# Altium PCB bms_slave.PcbDoc (part 1 of 2)
Units mm, origin at the board's own origin, x right, y up, seen from the top; angles counter-clockwise.
Board outline 145.01 x 85.89 mm, 4 copper layers (Top, Internal Plane 1, Internal Plane 2, Bottom), stack 2.023 mm thick; 168 components, 117 nets, 483 pads, 146 vias.
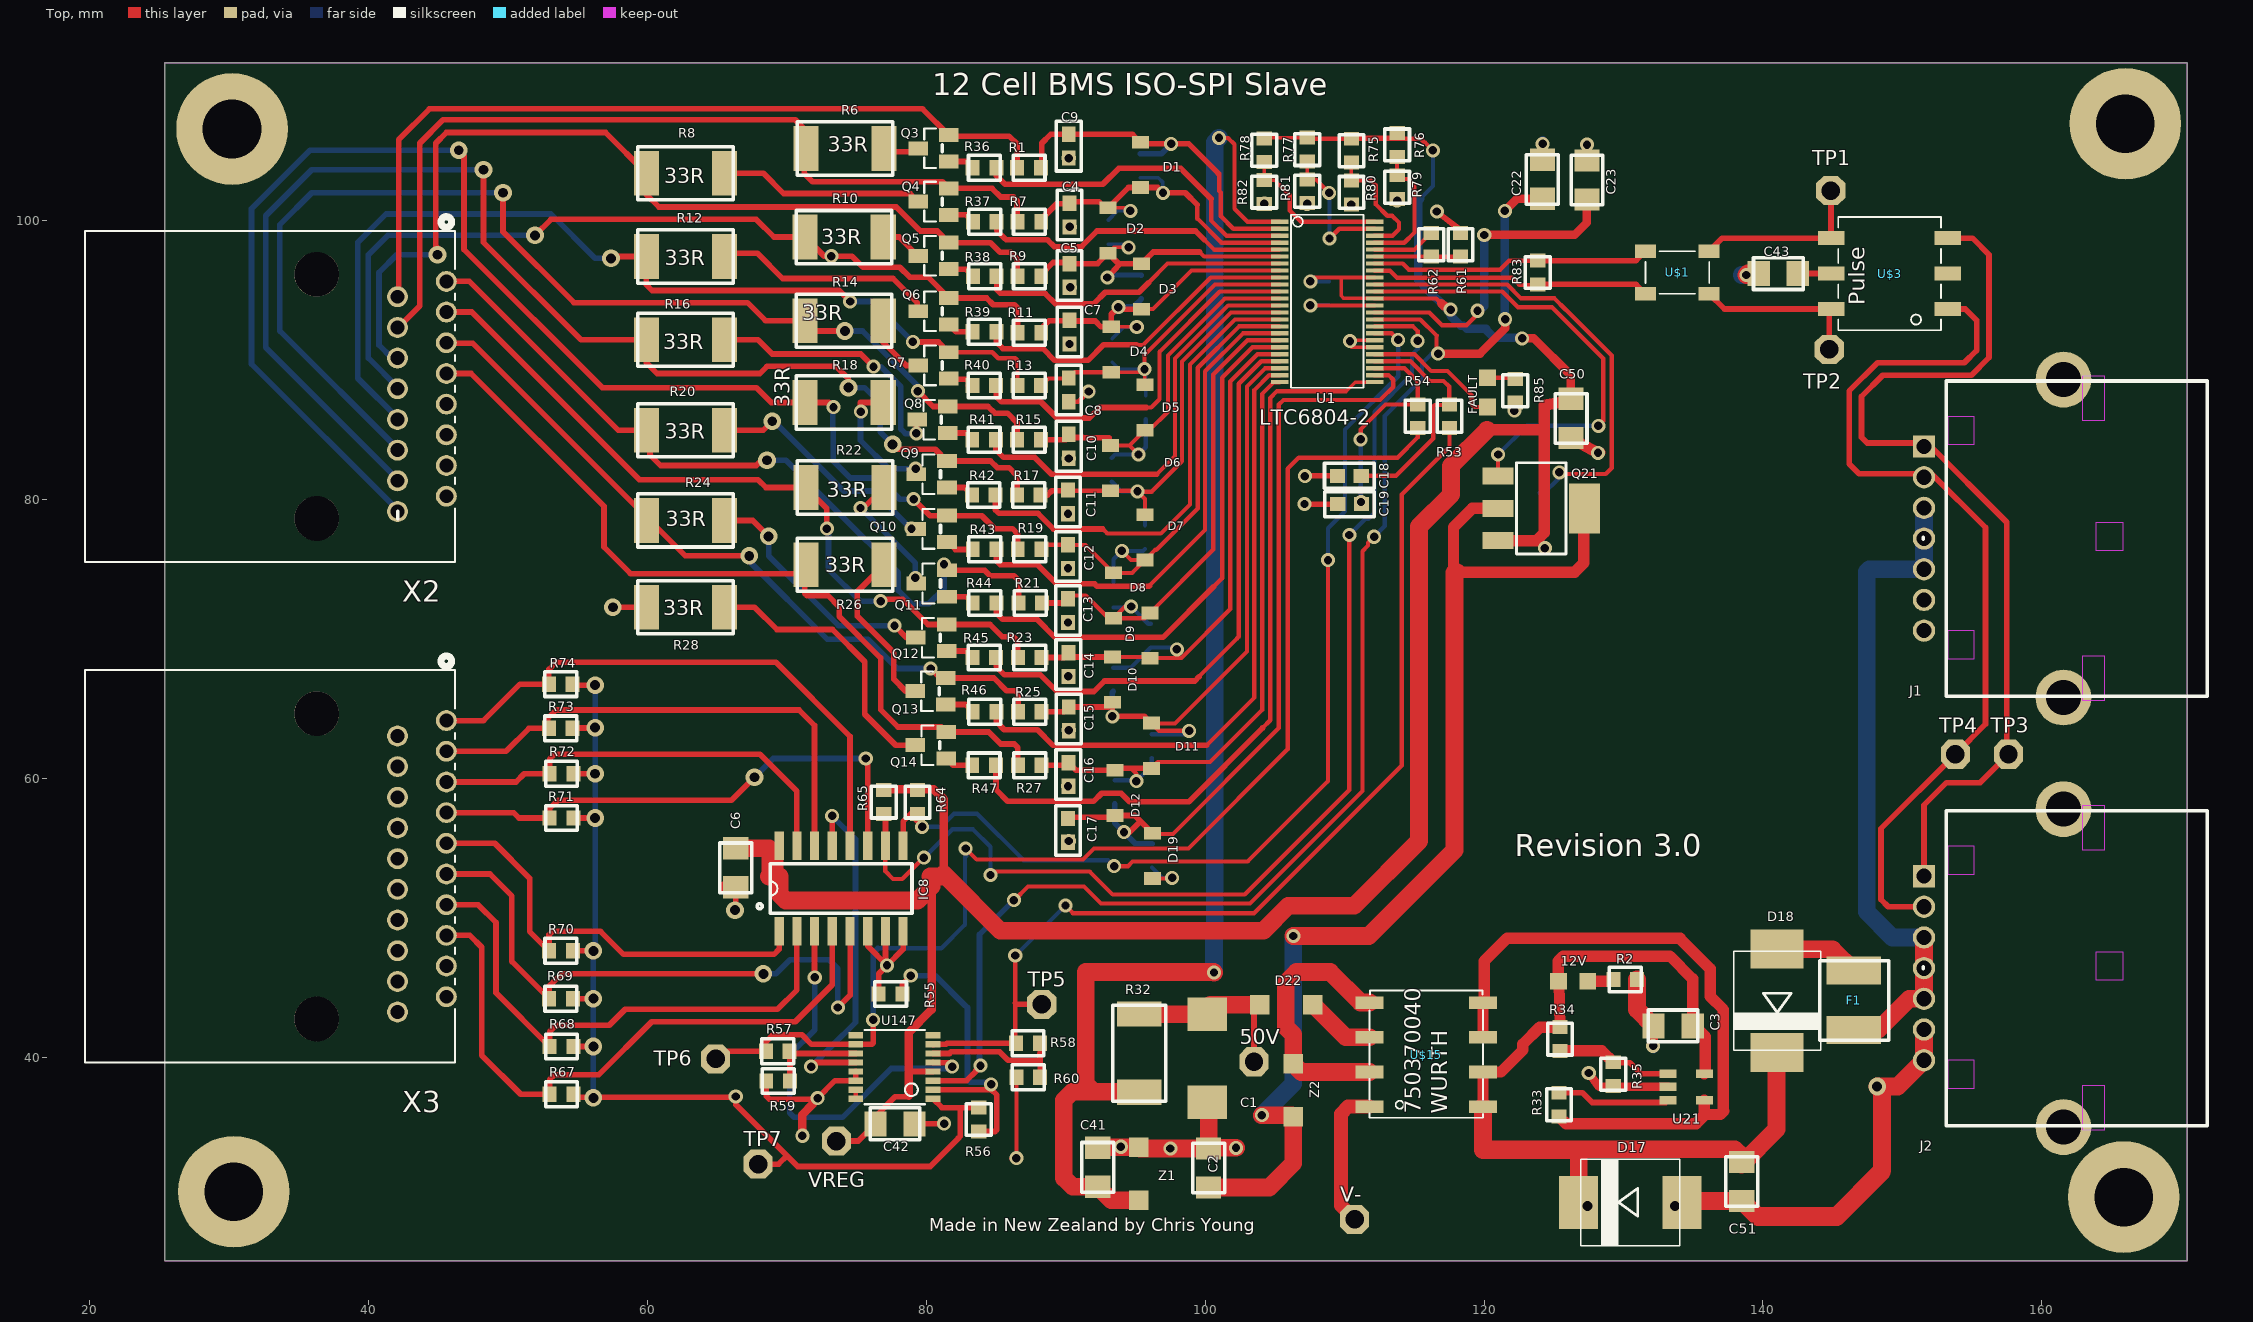
[diagram p0: Top view]
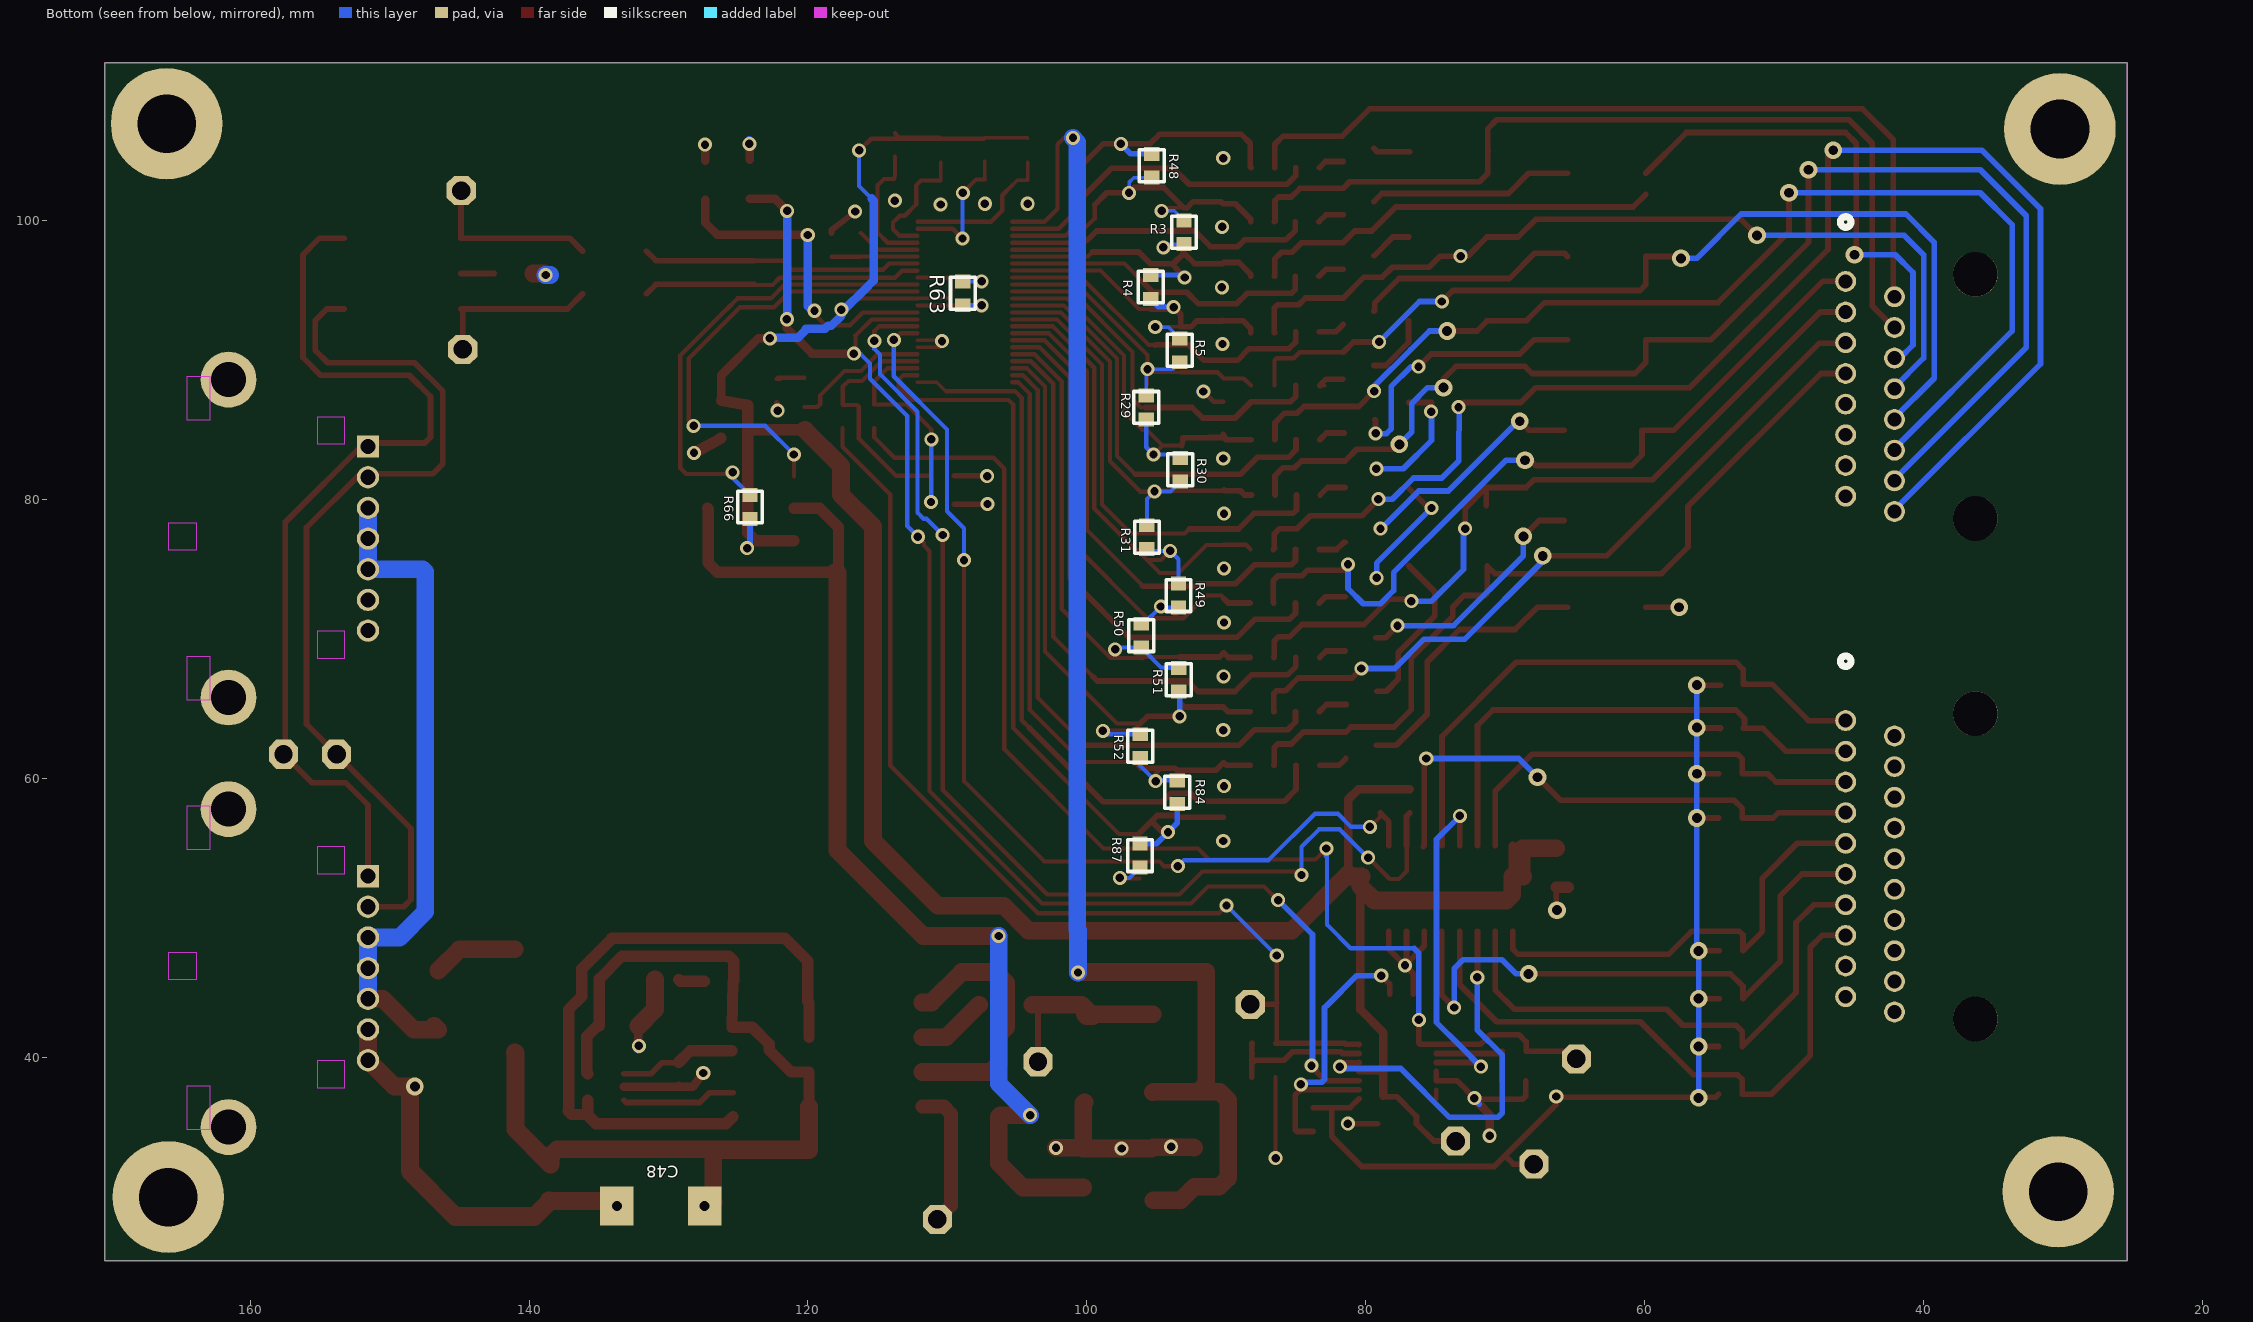
[diagram p1: Bottom view, seen from below]
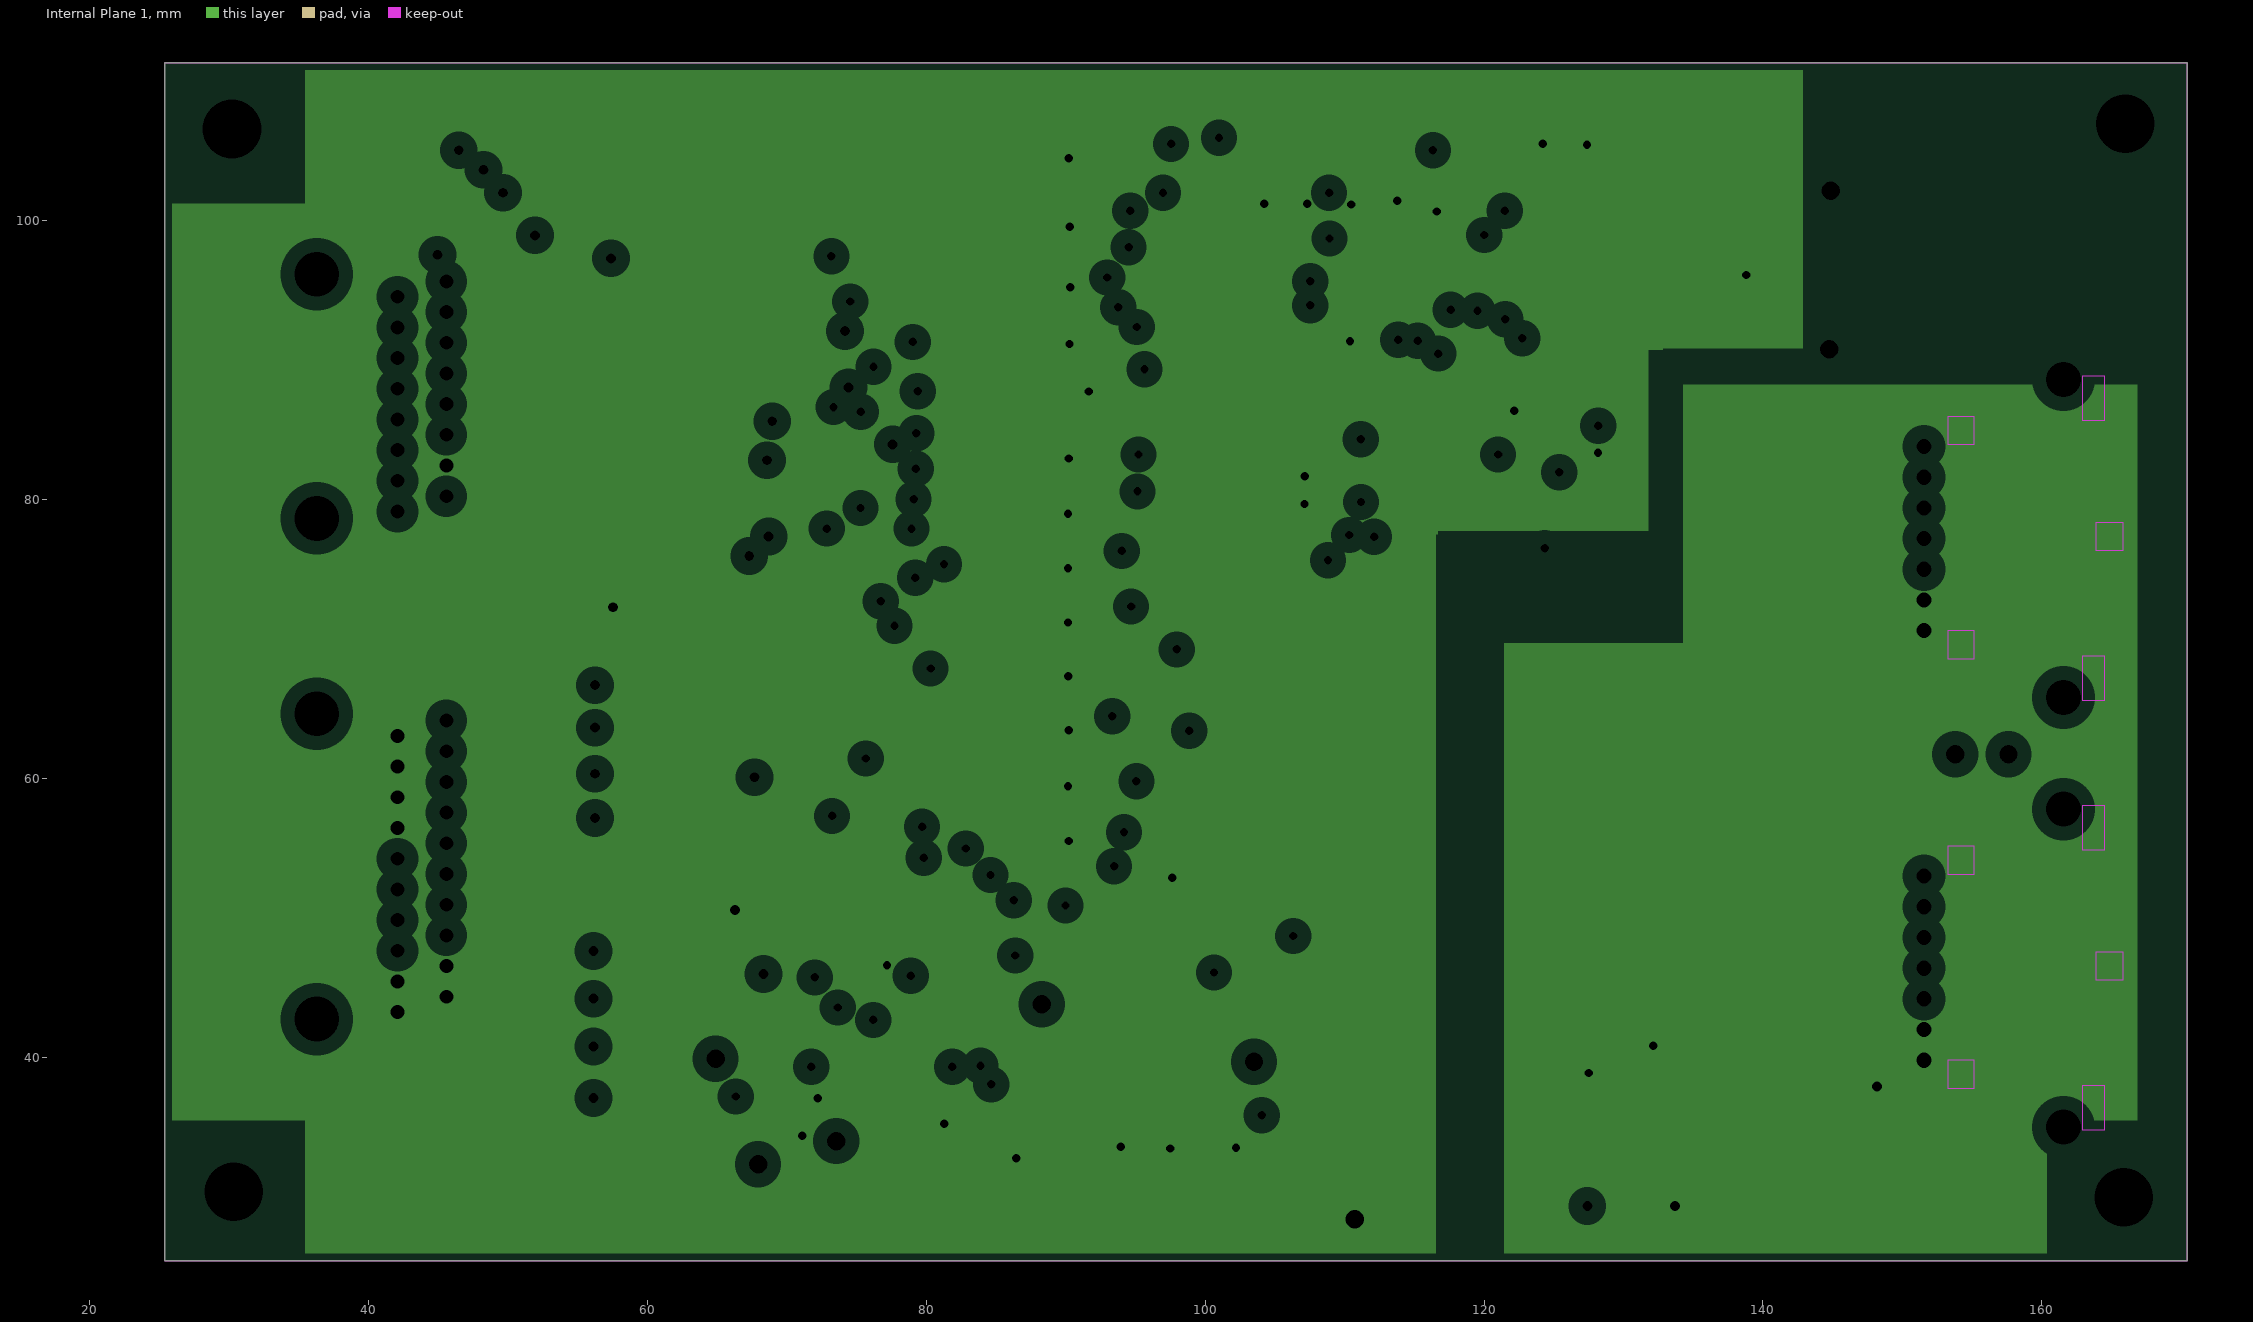
[diagram p2: Internal Plane 1, clearances drawn from the general rule]
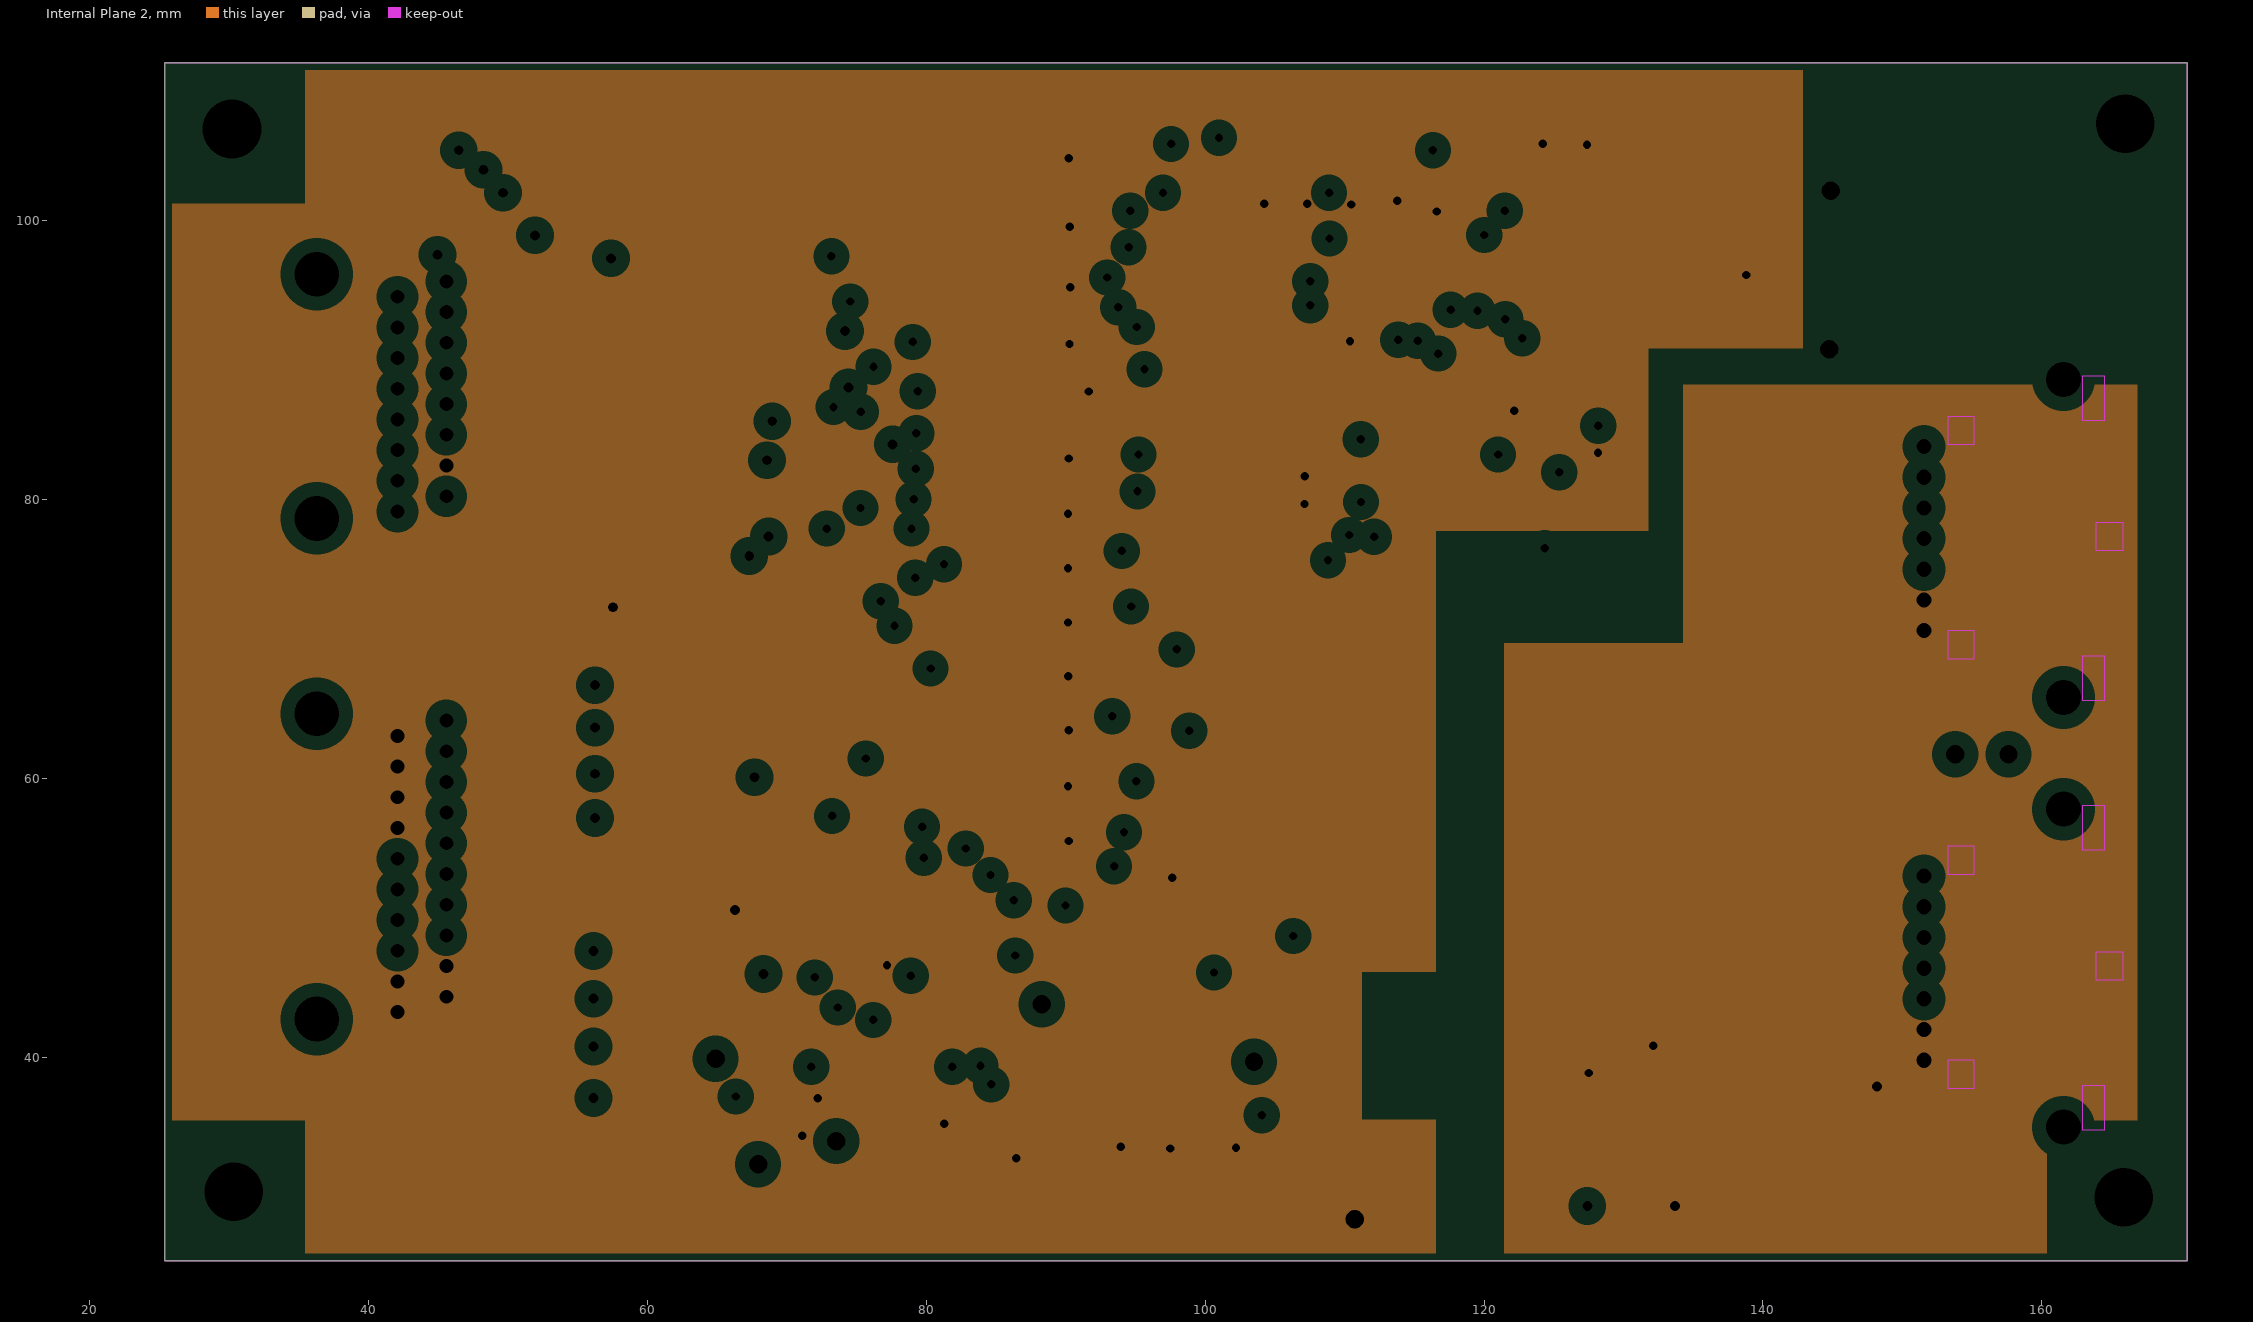
[diagram p3: Internal Plane 2, clearances drawn from the general rule]

## Layer stack, top to bottom
Top Solder: solder mask 0.0102, Solder Resist, Dk 3.5
Top: signal copper 0.035
Dielectric 1: core 1.5, FR-4, Dk 4.8
Internal Plane 1: plane copper 0.036, net V-
Dielectric 3: prepreg 0.127, Dk 4.2
Internal Plane 2: plane copper 0.036, net V-
Dielectric 2: core 0.254, Dk 4.2
Bottom: signal copper 0.035
Bottom Solder: solder mask 0.0102, Solder Resist, Dk 3.5

## Board outline
25.4,25.4 170.409,25.4 170.409,111.293 25.4,111.293

## Design rules (kind name [scope] priority, off if disabled: settings)
Clearance [All] p1: gap=0.152 ignorepadtopadclearanceinfootprint=FALSE
Clearance "Clearance (Same Net)" [All] p2: gap=0 ignorepadtopadclearanceinfootprint=FALSE
ComponentClearance [All] p1 off: gap=0.254 collisioncheckmode=3 verticalgap=0.254 showdistances=FALSE
HoleSize HoleSize_1 [All] p1: absolutevalues=TRUE maxlimit=2540 minlimit=0.305 maxpercent=80.000 minpercent=20.000
HoleSize [All] p2: absolutevalues=TRUE maxlimit=2.54 minlimit=0.025 maxpercent=80.000 minpercent=20.000
HoleToHoleClearance mdViaViaSameLayer [All] p1: gap=0.203 allowstackedmicrovias=TRUE
HoleToHoleClearance [All] p2: gap=0.254 allowstackedmicrovias=TRUE
MinimumSolderMaskSliver [All] p1 off: minsoldermaskwidth=0.254
PasteMaskExpansion mlMinCreamFrame [All] p1: expansion=0
PasteMaskExpansion [All] p2: expansion=0
PlaneClearance [All] p1: clearance=1
PlaneConnect [All] p1: planeconnectstyle=Relief reliefexpansion=0.508 reliefentries=4 reliefconductorwidth=0.254 reliefairgap=0.254
PolygonConnect ThermalVias [IsVia] p1: connectstyle=Direct reliefconductorwidth=0.254 reliefentries=4 polygonreliefangle="90 Angle" airgapwidth=0.254
PolygonConnect [All] p2: connectstyle=Relief reliefconductorwidth=0.254 reliefentries=4 polygonreliefangle="90 Angle" airgapwidth=0.254
RoomDefinition bms_slave [InComponentClass('bms_slave')] p1: confinementstyle=ConfineIn formatcopy=TRUE lockcomponents=FALSE outline 1.651,24.638 173.482,24.638 173.482,111.293 1.651,111.293
RoutingVias [All] p1: holewidth=0.711 width=1.27 viastyle="Through Hole" minholewidth=0.711 minwidth=1.27 maxholewidth=0.711 maxwidth=1.27
SilkToSilkClearance [All] p1 off: silktosilkclearance=0.254
SilkToSolderMaskClearance [IsPad] p1 off: minsilkscreentomaskgap=0.254 clearancetoexposedcopper=TRUE
SolderMaskExpansion mlMinStopFrame [All] p1: expansion=0.102
SolderMaskExpansion [All] p2: expansion=0.102
Width Width_1 [All] p1: maxlimit=2540 minlimit=0.152 preferedwidth=0.406 minimp=50.000000 maximp=50.000000 favimp=50.000000
Width [All] p2: maxlimit=5 minlimit=0.152 preferedwidth=0.406 minimp=50.000000 maximp=50.000000 favimp=50.000000
21 further rules are at their usual default settings.

## Components (designator, comment, footprint, x,y, rotation, side; value= is the part's Value field where it differs from the comment)
12V "Green" CHIP-LED0805 126.39,45.441 r270 top
50V "PTR1PAD1-13" P1-13 103.505,39.675 r0 top
C1 "1uF 100V" SMC_D 100.152,39.929 r270 top
C2 "4.7uF" C1206 100.254,32.055 r90 top
C3 "4.7uF" C1206 133.553,42.24 r180 top
C4 "100nF" C0603@1 90.272,100.381 r270 top
C5 "100nF" C0603@1 90.272,96.05 r270 top
C6 "0.1uF" C1206 66.345,53.581 r270 top
C7 "100nF" C0603@1 90.272,91.986 r270 top
C8 "100nF" C0603@1 90.221,87.846 r270 top
C9 "100nF" C0603@1 90.221,105.321 r270 top
C10 "100nF" C0603@1 90.221,83.807 r270 top
C11 "100nF" C0603@1 90.17,79.819 r270 top
C12 "100nF" C0603@1 90.17,75.895 r270 top
C13 "100nF" C0603@1 90.17,72.022 r270 top
C14 "100nF" C0603@1 90.195,68.148 r270 top
C15 "100nF" C0603@1 90.221,64.262 r270 top
C16 "100nF" C0603@1 90.195,60.274 r270 top
C17 "100nF" C0603@1 90.17,56.261 r270 top
C18 "10nF" C0603@1 110.338,81.686 r180 top
C19 "10nF" C0603@1 110.363,79.654 r180 top
C22 "1uF" C1206 124.181,102.946 r90 top
C23 "1uF" C1206 127.381,102.895 r90 top
C41 "0.1uF" C1206 92.304,32.106 r90 top
C42 "0.1uF" C1206 77.762,35.217 r0 top
C43 "100pF" C1206@1 141.097,96.19 r180 top
C48 "10uF" SMC_D 130.556,29.337 r0 bottom
C50 "1uF" C1206 126.238,85.801 r270 top
C51 "4.7uF" C1206 138.481,31.09 r270 top
D1 "SMF5.0AT1" SOD123FL 95.352,103.988 r270 top
D2 "SMF5.0AT1" SOD123FL 93.04,99.276 r270 top
D3 "SMF5.0AT1" SOD123FL 95.428,95.263 r270 top
D4 "SMF5.0AT1" SOD123FL 93.269,90.742 r270 top
D5 "SMF5.0AT1" SOD123FL 95.682,86.589 r270 top
D6 "SMF5.0AT1" SOD123FL 93.205,82.233 r270 top
D7 "SMF5.0AT1" SOD123FL 95.694,77.279 r270 top
D8 "SMF5.0AT1" SOD123FL 93.434,73.101 r270 top
D9 "SMF5.0AT1" SOD123FL 96.037,70.231 r270 top
D10 "SMF5.0AT1" SOD123FL 93.345,67.069 r270 top
D11 "SMF5.0AT1" SOD123FL 96.139,62.332 r270 top
D12 "SMF5.0AT1" SOD123FL 93.548,58.953 r270 top
D17 "SCHOTTKY-DIODESMC" SMC 130.48,29.591 r0 top
D18 "S3D" SMC 141.021,44.044 r90 top
D19 "SMF5.0AT1" SOD123FL 96.228,54.432 r270 top
D22 "CMHD459A" SOD123 105.816,43.764 r0 top
F1 "LITTLEFUSE_PTC" 1812 146.482,41.961 r90 top
FAULT "RED" CHIP-LED0805 120.244,87.668 r0 top
IC8 "4052D" SO16 73.901,52.095 r0 top
J1 "MX34007NF1" CONN_MX34007NF1 151.544,77.186 r90 top
J2 "MX34007NF1" CONN_MX34007NF1 151.544,46.385 r90 top
Q3 "SI2351" SOT23 80.518,105.169 r90 top
Q4 "SI2351" SOT23 80.518,101.346 r90 top
Q5 "SI2351" SOT23 80.518,97.46 r90 top
Q6 "SI2351" SOT23 80.518,93.485 r90 top
Q7 "SI2351" SOT23 80.518,89.599 r90 top
Q8 "SI2351" SOT23 80.454,85.712 r90 top
Q9 "SI2351" SOT23 80.391,81.801 r90 top
Q10 "SI2351" SOT23 80.391,77.876 r90 top
Q11 "SI2351" SOT23 80.391,73.965 r90 top
Q12 "SI2351" SOT23 80.366,70.079 r90 top
Q13 "SI2351" SOT23 80.302,66.243 r90 top
Q14 "SI2351" SOT23 80.328,62.37 r90 top
Q21 "NSV1C201MZ4" SOT223 124.104,79.35 r270 top
R1 "100R" R0603 87.376,103.784 r0 top
R2 "3K3" R0603 130.124,45.568 r180 top
R3 "DNF" R0603 93.04,99.149 r270 bottom
R4 "DNF" R0603 95.428,95.225 r270 bottom
R5 "DNF" R0603 93.332,90.678 r270 bottom
R6 "33R" R2512 74.168,105.156 r0 top
R7 "100R" R0603 87.401,99.911 r0 top
R8 "33R" R2512 62.732,103.378 r0 top
R9 "100R" R0603 87.401,95.999 r0 top
R10 "33R" R2512 74.117,98.806 r0 top
R11 "100R" R0603 87.401,91.948 r0 top
R12 "33R" R2512 62.738,97.409 r0 top
R13 "100R" R0603 87.389,88.163 r0 top
R14 "33R" R2512 74.117,92.812 r0 top
R15 "100R" R0603 87.376,84.277 r0 top
R16 "33R" R2512 62.738,91.44 r0 top
R17 "100R" R0603 87.351,80.315 r0 top
R18 "33R" R2512 74.117,86.944 r0 top
R19 "100R" R0603 87.414,76.416 r0 top
R20 "33R" R2512 62.738,84.963 r0 top
R21 "100R" R0603 87.452,72.568 r0 top
R22 "33R" R2512 74.168,80.848 r0 top
R23 "100R" R0603 87.427,68.656 r0 top
R24 "33R" R2512 62.738,78.486 r0 top
R25 "100R" R0603 87.427,64.77 r0 top
R26 "33R" R2512 74.168,75.311 r0 top
R27 "100R" R0603 87.427,60.922 r0 top
R28 "33R" R2512 62.738,72.263 r0 top
R29 "DNF" R0603 95.745,86.589 r270 bottom
R30 "DNF" R0603 93.307,82.118 r270 bottom
R31 "DNF" R0603 95.694,77.292 r270 bottom
R32 "100R 2W" R2512 95.275,40.284 r90 top
R33 "130K" R0603 125.374,36.601 r90 top
R34 "100k" R0603 125.451,41.3 r90 top
R35 "22K1" R0603 129.261,38.786 r90 top
R36 "3K3" R0603 84.176,103.784 r0 top
R37 "3K3" R0603 84.201,99.911 r0 top
R38 "3K3" R0603 84.201,95.999 r0 top
R39 "3K3" R0603 84.176,92.011 r0 top
R40 "3K3" R0603 84.163,88.163 r0 top
R41 "3K3" R0603 84.15,84.277 r0 top
R42 "3K3" R0603 84.125,80.315 r0 top
R43 "3K3" R0603 84.188,76.416 r0 top
R44 "3K3" R0603 84.188,72.568 r0 top
R45 "3K3" R0603 84.163,68.656 r0 top
R46 "3K3" R0603 84.188,64.77 r0 top
R47 "3K3" R0603 84.15,60.922 r0 top
R48 "DNF" R0603 95.352,103.924 r270 bottom
R49 "DNF" R0603 93.434,73.101 r270 bottom
R50 "DNF" R0603 96.101,70.231 r270 bottom
R51 "DNF" R0603 93.408,67.069 r270 bottom
R52 "DNF" R0603 96.164,62.306 r270 bottom
R53 "100R" R0603 117.526,85.954 r270 top
R54 "100R" R0603 115.24,85.954 r270 top
R55 "10K" R0603 77.445,44.526 r0 top
R56 "4K99" R0603 83.769,35.535 r270 top
R57 "10K" R0603 69.355,40.424 r0 top
R58 "10K" R0603 87.3,41.008 r0 top
R59 "10K" R0603 69.38,38.291 r0 top
R60 "10K" R0603 87.325,38.557 r0 top
R61 "806R" R0603 118.313,98.247 r90 top
R62 "1K21" R0603 116.205,98.247 r270 top
R63 "LiNK" R0603 108.89,94.767 r90 bottom
R64 "10K" R0603 79.375,58.293 r90 top
R65 "10K" R0603 76.962,58.293 r90 top
R66 "1M" R0603 124.155,79.451 r270 bottom
R67 "78K7" R0603 53.848,37.338 r0 top
R68 "78K7" R0603 53.848,40.767 r0 top
R69 "78K7" R0603 53.809,44.196 r0 top
R70 "78K7" R0603 53.809,47.625 r0 top
R71 "78K7" R0603 53.848,57.15 r0 top
R72 "78K7" R0603 53.848,60.325 r0 top
R73 "78K7" R0603 53.797,63.576 r0 top
R74 "78K7" R0603 53.797,66.751 r0 top
R75 "R-US_R0603" R0603 110.49,105.004 r270 top
R76 "R-US_R0603" R0603 113.767,105.41 r270 top
R77 "R-US_R0603" R0603 107.315,105.08 r270 top
R78 "R-US_R0603" R0603 104.242,105.029 r270 top
R79 "R-US_R0603" R0603 113.767,102.387 r270 top
R80 "R-US_R0603" R0603 110.49,102.006 r270 top
R81 "R-US_R0603" R0603 107.315,102.083 r270 top
R82 "R-US_R0603" R0603 104.242,102.032 r270 top
R83 "120R" R0603 123.85,96.266 r90 top
R84 "DNF" R0603 93.523,59.004 r270 bottom
R85 "3K3" R0603 122.237,87.782 r90 top
R87 "100R" R0603 96.19,54.458 r90 bottom
TP1 "PTR1PAD1-13" P1-13 144.856,102.133 r0 top
TP2 "PTR1PAD1-13" P1-13 144.755,90.754 r0 top
TP3 "PTR1PAD1-13" P1-13 157.607,61.722 r0 top
TP4 "PTR1PAD1-13" P1-13 153.797,61.722 r0 top
TP5 "PTR1PAD1-13" P1-13 88.29,43.79 r0 top
TP6 "PTR1PAD1-13" P1-13 64.897,39.878 r0 top
TP7 "PTR1PAD1-13" P1-13 67.945,32.334 r0 top
U1 "LTC6804-2" SSOP48 105.359,99.924 r270 top
U21 "LT8300" TSOT23-5 134.493,37.871 r270 top
U147 "LT6005IGN" TSSOP16 77.724,39.294 r90 top
U$1 "DLW43SH510XK2" DLW43S 131.572,97.79 r270 top
U$3 "T3001NL" T3001NL 153.264,93.65 r90 top
U$15 "WURTH_750370040" WE_750370040 111.785,36.449 r0 top
V- "PTR1PAD1-13" P1-13 110.719,28.372 r0 top
VREG "PTR1PAD1-13" P1-13 73.558,33.985 r0 top
X2 "MX34016NF1" CONN_MX34016NF1 36.307,96.063 r270 top
X3 "Part Number: MX34020NF1" CONN_MX34020NF1 38.593,43.235 r270 top value=Value
Z1 "CMHZ5265B" SOD123 95.25,31.648 r90 top
Z2 "CMMSH1-40" SOD123 106.324,37.617 r90 top

## Footprints (in the part's own frame and the unit in brackets; to place one, negate y for a bottom-side part, rotate by r counter-clockwise, add the part's x,y. Pads: shape width x height; smd on the part's side, far side on the other; paste and mask are expansions set on the pad)
1812 [mm] "1812"
  rect 2x3.9 smd: P$1(0,-0.03) P$2(4.25,-0.03)
  silkscreen extent -0.76,-2.54 4.95,2.41
C0603@1 [mm] "C0603@1"
  rect 1.1x1 smd: 1(-0.85,0) 2(0.85,0)
  silkscreen extent -1.78,-0.89 1.78,0.89
C1206 [mm] "C1206"
  rect 1.6x1.8 smd: 1(-1.4,0) 2(1.4,0)
  silkscreen extent -1.78,-1.14 1.78,1.14
C1206@1 [mm] "C1206@1"
  rect 1.6x1.8 smd: 1(-1.4,0) 2(1.4,0)
  silkscreen extent -1.78,-1.14 1.78,1.14
CHIP-LED0805 [mm] "CHIP-LED0805"
  rect 1.2x1.2 smd: A(0,-1.05) C(0,1.05)
CONN_MX34007NF1 [mm]
  round 4 hole 2.5: 0(-11.4,-10) 0(11.4,-10)
  rect 1.6x1.6 hole 1.092: 1(6.6,0)
  round 1.6 hole 1.092: 2(4.4,0) 3(2.2,0) 4(0,0) 5(-2.2,0) 6(-4.4,0) 7(-6.6,0)
  Keep-Out Layer region: 8.5,-12.95 11.65,-12.95 11.65,-11.35 8.5,-11.35
  Keep-Out Layer region: 6.75,-3.6 8.75,-3.6 8.75,-1.7 6.75,-1.7
  Keep-Out Layer region: -8.6,-3.6 -6.6,-3.6 -6.6,-1.7 -8.6,-1.7
  Keep-Out Layer region: -0.85,-14.3 1.15,-14.3 1.15,-12.3 -0.85,-12.3
  Keep-Out Layer region: -11.6,-12.95 -8.45,-12.95 -8.45,-11.35 -11.6,-11.35
  silkscreen extent -11.3,-20.3 11.3,0.05
CONN_MX34016NF1 [mil]
  round 59 hole 39 mask+0: 1(17.17,365.59) 2(60.47,227.8) 3(103.78,365.59) 4(147.09,227.8) 5(190.39,365.59) 6(233.7,227.8) 7(277.01,365.59) 8(320.31,227.8) 9(363.62,365.59) 10(406.93,227.8) 11(450.24,365.59) 12(493.54,227.8) 13(536.85,365.59) 14(580.16,227.8) 15(623.46,365.59) 16(666.77,227.8)
  round 126 hole 126: 17(-2.52,-0.55) 18(686.46,-0.55)
  silkscreen extent -165,-655 809,390, body extent 840,90 850,100, height 10
CONN_MX34020NF1 [mil]
  round 59 hole 39 mask+0: 1(-822.83,275.59) 2(-779.53,137.8) 3(-736.22,275.59) 4(-692.91,137.8) 5(-649.61,275.59) 6(-606.3,137.8) 7(-562.99,275.59) 8(-519.69,137.8) 9(-476.38,275.59) 10(-433.07,137.8) 11(-389.76,275.59) 12(-346.46,137.8) 13(-303.15,275.59) 14(-259.84,137.8) 15(-216.54,275.59) 16(-173.23,137.8) 17(-129.92,275.59) 18(-86.61,137.8) 19(-43.31,275.59) 20(0,137.8)
  round 126 hole 126: 21(-842.52,-90.55) 22(19.68,-90.55)
  silkscreen extent -1005,-745 143,300, body extent 0,0 10,10, height 10
DLW43S [mm] "DLW43S"
  rect 1x1.5 smd: P$1(0,0) P$2(0,4.572) P$3(3.048,4.572) P$4(3.048,0)
  silkscreen extent 0,0 3.05,4.57
P1-13 [mil] "P1-13"
  oct 82.3x82.3 hole 52: TP(0,0)
R0603 [mm] "R0603"
  rect 1x1.1 smd: 1(-0.85,0) 2(0.85,0)
  silkscreen extent -1.14,-0.89 1.14,0.89
R2512 [mm] "R2512"
  rect 1.8x3.2 smd: 1(-2.8,0) 2(2.8,0)
  silkscreen extent -3.43,-1.91 3.43,1.91
SMC [mm] "SMC"
  rect 2.8x3.8 smd: A(3.7,0) C(-3.7,0)
  silkscreen extent -3.56,-3.1 3.56,3.1
SMC_D [mm] "SMC_D"
  rect 2.4x2.8 smd: +(-3.15,0) -(3.15,0)
SO16 [mil] "SO16"
  rect 26x80 smd: 1(-175,-121) 2(-125,-121) 3(-75,-121) 4(-25,-121) 5(25,-121) 6(75,-121) 7(125,-121) 8(175,-121) 9(175,121) 10(125,121) 11(75,121) 12(25,121) 13(-25,121) 14(-75,121) 15(-125,121) 16(-175,121)
  silkscreen extent -237,-70 200,70
SOD123 [mm] "SOD123"
  rect 1.4x1.4 smd: A(1.9,0) C(-1.9,0)
SOD123FL [mm] "SOD123FL"
  rect 0.91x1.22 smd: A(1.625,0) C(-1.625,0)
SOT23 [mm] "SOT23"
  rect 1x1.4 smd: 1(-0.95,-1.1) 2(0.95,-1.1) 3(0,1.1)
  silkscreen extent -1.42,-0.64 1.42,0.66
SOT223 [mil] "SOT223"
  rect 48x88 smd: 1(-91,-122) 2(0,-122) 3(91,-122)
  rect 141.73x86.61 smd: 4(0,122.01)
  silkscreen extent -129,-70 129,70
SSOP48 [mm] "SSOP48"
  rect 0.3x1.25 smd: 1(0.02,-0.01) 2(0.52,-0.01) 3(1.02,-0.01) 4(1.52,-0.01) 5(2.02,-0.01) 6(2.52,-0.01) 7(3.02,-0.01) 8(3.52,-0.01) 9(4.02,-0.01) 10(4.52,-0.01) 11(5.02,-0.01) 12(5.52,-0.01) 13(6.02,-0.01) 14(6.52,-0.01) 15(7.02,-0.01) 16(7.52,-0.01) 17(8.02,-0.01) 18(8.52,-0.01) 19(9.02,-0.01) 20(9.52,-0.01) 21(10.02,-0.01) 22(10.52,-0.01) 23(11.02,-0.01) 24(11.52,-0.01) 25(11.52,6.79) 26(11.02,6.79) 27(10.52,6.79) 28(10.02,6.79) 29(9.52,6.79) 30(9.02,6.79) 31(8.52,6.79) 32(8.02,6.79) 33(7.52,6.79) 34(7.02,6.79) 35(6.52,6.79) 36(6.02,6.79) 37(5.52,6.79) 38(5.02,6.79) 39(4.52,6.79) 40(4.02,6.79) 41(3.52,6.79) 42(3.02,6.79) 43(2.52,6.79) 44(2.02,6.79) 45(1.52,6.79) 46(1.02,6.79) 47(0.52,6.79) 48(0.02,6.79)
  silkscreen extent -0.48,0.79 11.92,5.99
T3001NL [mil] "T3001NL"
  rect 40x75 smd: P$1(0,0) P$2(100,0) P$3(200,0) P$4(200,330) P$5(100,330) P$6(0,330)
  silkscreen extent -60,20 260,310
TSOT23-5 [mm] "TSOT23-5"
  rect 0.62x1.22 smd: 1(-0.95,-1.3) 2(0,-1.3) 3(0.95,-1.3) 4(0.95,1.3) 5(-0.95,1.3)
TSSOP16 [mm] "TSSOP16"
  rect 0.45x1.05 smd mask-0.525: 1(-2.275,-2.768) 2(-1.625,-2.768) 3(-0.975,-2.768) 4(-0.325,-2.768) 5(0.325,-2.768) 6(0.975,-2.768) 7(1.625,-2.768) 8(2.275,-2.768) 9(2.275,2.768) 10(1.625,2.768) 11(0.975,2.768) 12(0.325,2.768) 13(-0.325,2.768) 14(-0.975,2.768) 15(-1.625,2.768) 16(-2.275,2.768)
  silkscreen extent -2.67,-2.18 2.67,2.16
WE_750370040 [mm] "WE_750370040"
  rect 2x0.9 smd: P$1(0,0) P$2(0,2.49) P$3(0,4.98) P$4(0,7.47) P$5(8.14,7.47) P$6(8.14,4.98) P$7(8.14,2.49) P$8(8.14,0)
  silkscreen extent 0,-0.79 8.13,8.33

## Part data
12V FAULT: library part LEDCHIP-LED0805, "LED   OSRAM: - CHIPLED LG R971, LG N971, LY N971, LG Q971, LY Q971, LO R971, LY R971 LH N974, LH R974 LS Q976, LO Q976, LY Q976 LO Q996 - Hyper CHIPLED LW Q18S LB Q993, LB Q99A, LB R99A - SideLED LS A670, LO A670, LY A670, LG A670, LP A670 LB A673, LV A673, LT A673, LW A673 LH A674 LY A675 LS A676, LA A676, LO A676, LY A676, LW A676 LS A679, LY A679, LG A679 -  Hyper Micro SIDELED® LS Y876, LA Y876, LO Y876, LY Y876 LT Y87S - SmartLED LW L88C, LW L88S LB L89C, LB L89S, LG L890 LS L89K, LO L89K, LY L89K LS L896, LA L896, LO L896, LY L896 - TOPLED LS T670, LO T670, LY T670, LG T670, LP T670 LSG T670, LSP T670, LSY T670, LOP T670, LYG T670 LG T671, LOG T671, LSG T671 LB T673, LV T673, LT T673, LW T673 LH T674 LS T676, LA T676, LO T676, LY T676, LB T676, LH T676, LSB T676, LW T676 LB T67C, LV T67C, LT T67C, LS T67K, LO T67K, LY T67K, LW E67C LS E67B, LA E67B, LO E67B, LY E67B, LB E67C, LV E67C, LT E67C LW T67C LS T679, LY T679, LG T679 LS T770, LO T770, LY T770, LG T770, LP T770 LB T773, LV T773, LT T773, LW T773 LH T774 LS E675, LA E675, LY E675, LS T675 LS T776, LA T776, LO T776, LY T776, LB T776 LHGB T686 LT T68C, LB T68C - Hyper Mini TOPLED® LB M676 - Mini TOPLED Santana® LG M470 LS M47K, LO M47K, LY M47K    Source: http://www.osram.convergy.de   LUXEON: - LUMILED® LXK2-PW12-R00, LXK2-PW12-S00, LXK2-PW14-U00, LXK2-PW14-V00 LXK2-PM12-R00, LXK2-PM12-S00, LXK2-PM14-U00 LXK2-PE12-Q00, LXK2-PE12-R00, LXK2-PE12-S00, LXK2-PE14-T00, LXK2-PE14-U00 LXK2-PB12-K00, LXK2-PB12-L00, LXK2-PB12-M00, LXK2-PB14-N00, LXK2-PB14-P00, LXK2-PB14-Q00 LXK2-PR12-L00, LXK2-PR12-M00, LXK2-PR14-Q00, LXK2-PR14-R00 LXK2-PD12-Q00, LXK2-PD12-R00, LXK2-PD12-S00 LXK2-PH12-R00, LXK2-PH12-S00 LXK2-PL12-P00, LXK2-PL12-Q00, LXK2-PL12-R00    Source: www.luxeon.com   KINGBRIGHT:   KA-3528ASYC Source: www.kingbright.com"
50V TP1 TP2 TP3 TP4 TP5 TP6 TP7 V- VREG: "TEST PIN", TP_SIGNAL_NAME=>TP_SIGNAL_NAME
C1: library part CPOL-USSMCD, "POLARIZED CAPACITOR, American symbol"
C2 C3 C6 C22 C23 C41 C42 C50 C51: library part C-EUC1206, "CAPACITOR, European symbol"
C4 C5 C7 C8 C9 C10 C11 C12 C13 C14 C15 C16 C17 C18 C19: library part C-EU-SMALL_0603
C43: library part C-EU-SMALL
C48: library part CPOL-EUSMCD, "POLARIZED CAPACITOR, European symbol", +=+
D1 D2 D3 D4 D5 D6 D7 D8 D9 D10 D11 D12 D19: "200 W Transient Voltage Suppressor   Source: Data sheet"
D17: "Schottky Diode"
D18: library part DIODE-SMC, "DIODE"
IC8: "Dual 4-channel ANALOG MULTIPLEXER", GND=GND, VCC=VCC, VEE=VEE
R1 R2 R3 R4 R5 R7 R9 R11 R13 R15 R17 R19 R21 R23 R25 R27 R29 R30 R31 R33 R34 R35 R36 R37 R38 R39 R40 R41 R42 R43 R44 R45 R46 R47 R48 R49 R50 R51 R52 R53 R54 R55 R56 R57 R58 R59 R60 R61 R62 R63 R64 R65 R66 R67 R68 R69 R70 R71 R72 R73 R74 R83 R84 R85 R87: library part R-US_R0603, "RESISTOR, American symbol"
R6 R8 R10 R12 R14 R16 R18 R20 R22 R24 R26 R28 R32: library part R-US_R2512, "RESISTOR, American symbol"
R75 R76 R77 R78 R79 R80 R81 R82: "RESISTOR, American symbol"
X3: library part MX34020NF1, "No Description Available", Built_By=EMA_Cory, Copyright="Copyright (C) 2018 Accelerated Designs. All rights reserved", Manufacturer_Part_Number=MX34020NF1, RefDes=RefDes, Type=DEV, Vendor="JAE Electronics"
U1: LTC6803-4=LTC6803-4
U147: V+=V+, V-=V-
U$15: 1=1, 3=3

## Free pads (board coordinates)
  round 8 hole 4.2: 2(30.226,106.553) 2(30.353,30.353) 2(165.862,29.972) 2(165.989,106.934)

## Via types
v1: diameter 1.006/1.006 (per signal layer), hole 0.6, Top to Bottom, 118 vias
v2: diameter 1.27, hole 0.711, Top to Bottom, 27 vias
v3: diameter 1.27/1.27 (per signal layer), hole 0.711, Top to Bottom, 1 vias

## Nets (pads, with @x,y where several pads share a name; then routed paths per layer and width w, separated by ;. In a path a pad name is that pad's centre, name@x,y a point inside that pad or via, vN(x,y) a via of type N, cw(c..) or ccw(c..) an arc to the next point about the centre after c; other vN are vias at no path point)
+12V: 12V.A C3.1 C48.+ C51.1 D17.C D18.C R34.2 U21.5 U$15.P$7 U$15.P$8 | length 74.3
  Top w0.813: U$15.P$8@119.925,36.449 U$15.P$7@119.925,38.939 121.21,38.939 122.784,40.513 122.784,40.945 123.989,42.15 R34.2@125.451,42.15 125.374,45.407 12V.A@125.34,45.441 125.324,45.457 125.324,46.888 125.679,47.244 133.325,47.244 134.953,45.615 C3.1@134.953,42.24 135.103,42.24 135.865,41.478 135.865,38.893 U21.5@135.793,38.821
  Top w1.27: U$15.P$8@119.925,36.449 119.925,33.35 120.091,33.35 ; D17.C@126.78,29.591 126.797,29.591 126.797,33.35 120.091,33.35 ; C51.1@138.481,32.49 138.481,32.588 C51.1@138.455,32.614 ; D18.C@141.021,40.344 140.97,40.293 140.97,34.823 138.455,32.309 C51.1@138.455,32.614 ; 120.091,33.35 120.142,33.401 137.973,33.401 138.455,32.918 C51.1@138.455,32.614
  other v2: 127.406,29.337
A0: R76.2 R79.1 U1.45 | length 9.5
  Top w0.305: U1.45@112.149,98.404 114.279,98.404 115.011,99.136 115.011,102.514 114.554,102.972 113.831,102.972 R79.1@113.767,103.237 R76.2@113.767,104.56
A2: R77.2 R81.1 U1.47 | length 10.1
  Top w0.254: R81.1@107.315,102.932 R77.2@107.315,104.23
  Top w0.305: R81.1@107.315,102.932 107.938,102.932 v1(108.89,101.981) ; v1(108.915,98.704) 109.614,99.404 U1.47@112.149,99.404
  Bottom w0.305: v1(108.89,101.981) 108.915,101.956 v1(108.915,98.704)
BMS_VREF2: C22.1 U1.34 U147.3 | length 103.3
  Top w0.305: v1(86.284,51.257) 86.309,51.257 87.3,52.248 91.313,52.248 92.532,51.029 103.226,51.029 111.277,59.08 111.277,76.276 111.684,76.683 111.684,76.886 v1(112.116,77.318) ; U1.34@112.149,92.904 115.427,92.904 116.586,91.745 ; 116.611,91.745 116.586,91.745 ; v1(116.713,90.449) 116.586,90.576 116.586,91.745
  Top w0.406: U147.3@80.492,38.319 82.896,38.319 83.566,38.989 83.566,39.065 v1(83.896,39.395)
  Top w0.61: v1(116.713,90.449) 119.71,90.449 121.514,92.253 v1(121.514,92.913) ; v1(121.488,100.686) 122.349,101.546 C22.1@124.181,101.546
  Bottom w0.305: v1@86.182,51.156 v1(86.284,51.257) ; v1(112.116,77.318) 112.878,78.08 112.878,85.979 115.545,88.646 115.545,89.738 116.256,90.449 v1(116.713,90.449)
  Bottom w0.406: v1(83.896,39.395) 83.82,39.472 83.82,48.793 v1@86.182,51.156
  Bottom w0.61: v1(121.488,100.686) 121.488,92.939 v1(121.514,92.913)
GND: C3.2 C48.- C51.2 D17.A J1.6 J1.7 J2.6 J2.7 R2.1 R35.1 U21.2 | length 61.6
  Top w0.61: v1(127.508,38.862) 128.245,37.871 U21.2@133.193,37.871 129.325,37.871 R35.1@129.261,37.936 ; v1(132.131,40.818) 132.153,40.84 C3.2@132.153,42.24
  Top w1.27: R2.1@130.974,45.568 130.974,43.419 C3.2@132.153,42.24 ; D17.A@134.18,29.591 134.278,29.69 C51.2@138.481,29.69 ; 148.514,37.096 148.514,31.75 145.287,28.524 139.647,28.524 C51.2@138.481,29.69 ; J2.6@151.544,41.985 J2.7@151.544,39.785 149.656,37.897 v3(148.184,37.897) 148.539,37.541 148.539,31.877 145.288,28.626 139.573,28.626 138.582,29.616 138.582,29.718 138.554,29.69 C51.2@138.481,29.69
  Bottom w0.61: v1(132.131,40.818) v1@132.156,40.564
  other v2: 133.706,29.337
Net12V_C: 12V.C R2.2 | length 1.9
  Top w0.813: 12V.C@127.44,45.441 129.147,45.441 R2.2@129.274,45.568
Net50V_TP: 50V.TP C1.+ D22.C R32.2 | length 14.5
  Top w0.406: 50V.TP@103.505,39.675 103.505,43.353 D22.C@103.916,43.764
  Top w1.27: R32.2@95.275,43.084 95.281,43.079 C1.+@100.152,43.079 100.025,42.951 99.568,42.951 100.381,43.764 D22.C@103.916,43.764
NetC2_1: C2.1 Q21.2 Q21.4 Z2.C | length 80.8
  Top w0.813: Q21.2@121.006,79.35 119.151,79.35 117.805,78.003 117.805,75.057 118.085,74.778 126.492,74.778 127.152,75.438 127.152,79.299 Q21.4@127.203,79.35
  Top w1.27: C2.1@100.254,30.655 104.594,30.655 106.324,32.385 Z2.C@106.324,35.717 106.202,35.839 v1(104.064,35.839) ; v1(106.324,48.692) 111.735,48.692 117.881,54.839 117.881,74.727 117.932,74.778 118.085,74.778
  Bottom w1.27: v1(104.064,35.839) 106.324,38.1 v1(106.324,48.692)
NetC4_1: C4.1 D1.A D2.C R3.1 R7.2 R48.2 U1.4 | length 26.9
  Top w0.254: D2.C@93.04,100.901 94.425,100.901 v1(94.64,100.686)
  Top w0.305: 99.441,101.117 99.441,100.127 101.164,98.404 U1.4@105.349,98.404
  Top w0.406: R7.2@88.251,99.911 88.251,100.088 89.357,101.194 90.235,101.194 C4.1@90.272,101.231 90.387,101.346 92.38,101.346 92.825,100.901 D2.C@93.04,100.901 94.502,102.363 D1.A@95.352,102.363 96.596,102.363 v1(96.977,101.981) 98.577,101.981 99.441,101.117
  Bottom w0.254: R3.1@93.04,99.999 93.727,100.686 v1(94.64,100.686) ; R48.2@95.352,103.074 95.378,103.048 96.647,103.048 96.977,102.718 v1(96.977,101.981)
NetC5_1: C5.1 D2.A D3.C R3.2 R4.1 R9.2 U1.6 | length 27.4
  Top w0.254: D2.A@93.04,97.651 93.459,98.069 v1(94.513,98.069)
  Top w0.305: 99.593,97.739 99.929,97.404 U1.6@105.349,97.404
  Top w0.406: R9.2@88.251,95.999 88.251,96.125 89.103,96.977 90.194,96.977 C5.1@90.272,96.9 92.289,96.9 D2.A@93.04,97.651 93.803,96.888 D3.C@95.428,96.888 ; v1(92.989,95.91) 93.892,96.876 D3.C@95.428,96.888 ; 99.593,97.739 96.279,97.739 D3.C@95.428,96.888
  Bottom w0.254: R3.2@93.04,98.299 94.284,98.299 v1(94.513,98.069)
  Bottom w0.406: v1(92.989,95.91) 93.052,96.1 R4.1@95.428,96.074
NetC7_1: C7.1 D3.A D4.C R4.2 R5.1 R11.2 U1.8 | length 25.9
  Top w0.254: D4.C@93.269,92.367 95.085,92.367 v1(95.098,92.354)
  Top w0.305: D3.A@95.428,93.638 95.44,93.65 96.266,93.65 99.02,96.404 U1.8@105.349,96.404
  Top w0.406: R11.2@88.251,91.948 88.251,92.239 88.824,92.812 90.247,92.812 C7.1@90.272,92.836 90.321,92.786 92.126,92.786 92.545,92.367 D4.C@93.269,92.367 93.269,93.269 v1(93.777,93.777) 94.094,93.638 D3.A@95.428,93.638
  Bottom w0.254: R5.1@93.332,91.528 94.159,92.354 v1(95.098,92.354)
  Bottom w0.406: v1(93.777,93.777) 94.881,93.828 R4.2@95.428,94.375
NetC8_1: C8.1 D4.A D5.C R5.2 R13.2 R29.1 U1.10 | length 26.3
  Top w0.254: D4.A@93.269,89.116 95.441,89.116 v1(95.656,89.332) 95.682,89.306 D5.C@95.682,88.214
  Top w0.305: R13.2@88.239,88.163 88.748,88.671 90.196,88.671 C8.1@90.221,88.696 90.641,89.116 D4.A@93.269,89.116 ; v1(95.656,89.332) 95.656,90.348 100.712,95.404 U1.10@105.349,95.404
  Bottom w0.254: R5.2@93.332,89.828 93.829,89.332 v1(95.656,89.332) 95.745,89.243 R29.1@95.745,87.438
NetC9_1: C9.1 D1.C R1.2 R48.1 U1.2 | length 26.1
  Top w0.305: 100.965,103.353 101.016,103.302 101.016,102.108 101.117,102.006 101.117,100.305 102.018,99.404 U1.2@105.349,99.404
  Top w0.406: R1.2@88.226,103.784 88.29,103.849 88.29,105.537 88.924,106.171 C9.1@90.221,106.171 94.793,106.171 D1.C@95.352,105.613 95.478,105.486 v1(97.561,105.486) 98.831,105.486 100.965,103.353
  Bottom w0.406: R48.1@95.352,104.774 96.849,104.774 v1(97.561,105.486)
NetC10_1: C10.1 D5.A D6.C R15.2 R29.2 R30.1 U1.12 | length 30.4
  Top w0.305: D6.C@93.205,83.858 94.577,83.858 ; v1(95.225,83.21) 94.577,83.858 ; U1.12@105.349,94.404 101.414,94.404 97.333,90.322 97.333,86.284 96.013,84.964 D5.A@95.682,84.964 94.577,83.859 94.577,83.858
  Top w0.406: R15.2@88.226,84.277 90.019,84.277 C10.1@90.221,84.657 90.271,84.43 91.237,84.43 93.104,84.416 D6.C@93.205,83.858
  Bottom w0.305: R30.1@93.307,82.968 93.549,83.21 v1(95.225,83.21) 95.745,83.731 R29.2@95.745,85.739
NetC11_1: C11.1 D6.A D7.C R17.2 R30.2 R31.1 U1.14 | length 33.5
  Top w0.305: C11.1@90.17,80.669 90.232,80.607 D6.A@93.205,80.607 95.11,80.607 v1(95.148,80.569) ; D7.C@95.694,78.905 95.694,80.023 v1(95.148,80.569) ; U1.14@105.349,93.404 101.862,93.404 98.349,89.891 98.349,82.728 96.164,80.543 95.174,80.543 v1(95.148,80.569)
  Top w0.406: R17.2@88.2,80.315 88.697,80.315 89.002,80.62 90.12,80.62 C11.1@90.17,80.669
  Bottom w0.305: R30.2@93.307,81.268 94.006,80.569 v1(95.148,80.569) 95.694,80.023 R31.1@95.694,78.142
NetC12_1: C12.1 D7.A D8.C R19.2 R31.2 R49.1 U1.16 | length 37.5
  Top w0.305: R19.2@88.264,76.416 88.593,76.745 C12.1@90.17,76.745 90.182,76.733 91.415,76.733 93.422,74.726 D8.C@93.434,74.726 94.766,74.726 D7.A@95.694,75.654 ; v1(94.031,76.302) 94.678,75.654 D7.A@95.694,75.654 ; U1.16@105.349,92.404 102.437,92.404 99.466,89.433 99.466,79.35 96.495,76.378 96.418,76.378 D7.A@95.694,75.654
  Bottom w0.305: R49.1@93.434,73.951 93.434,75.705 v1(94.031,76.302) 95.554,76.302 R31.2@95.694,76.442
NetC13_1: C13.1 D8.A D9.C R21.2 R49.2 R50.1 U1.18 | length 38.4
  Top w0.305: C13.1@90.17,72.872 90.347,73.101 91.44,73.101 93.065,71.476 D8.A@93.434,71.476 ; v1(94.691,72.314) 94.272,72.314 D8.A@93.434,71.476 ; U1.18@105.349,91.404 103.037,91.404 100.584,88.951 100.584,76.403 D9.C@96.037,71.856 95.658,71.476 D8.A@93.434,71.476
  Top w0.406: R21.2@88.302,72.568 89.866,72.568 C13.1@90.17,72.872
  Bottom w0.305: R49.2@93.434,72.251 94.629,72.251 v1(94.691,72.314) 95.924,71.081 R50.1@96.101,71.081
NetC14_1: C14.1 D9.A D10.C R23.2 R50.2 R51.1 U1.20 | length 42.3
  Top w0.305: D10.C@93.345,68.694 96.482,68.694 D9.A@96.545,68.631 ; D9.A@96.037,68.606 96.062,68.631 D9.A@96.545,68.631 ; v1(97.968,69.24) 97.968,68.631 ; U1.20@105.349,90.404 103.764,90.404 101.803,88.443 101.803,72.136 98.298,68.631 97.968,68.631 ; D9.A@96.545,68.631 97.968,68.631
  Top w0.406: R23.2@88.277,68.656 89.854,68.656 C14.1@90.195,68.998 90.5,68.694 D10.C@93.345,68.694
  Bottom w0.305: R51.1@93.408,67.919 94.639,67.919 R50.2@96.101,69.381 97.827,69.381 v1(97.968,69.24)
NetC15_1: C15.1 D10.A D11.C R25.2 R51.2 R52.1 U1.22 | length 47.8
  Top w0.305: v1(98.857,63.398) 96.697,63.398 D11.C@96.139,63.957 96.164,63.932 97.841,63.932 102.997,69.088 102.997,88.087 104.288,89.378 104.288,89.404 U1.22@105.349,89.404
  Top w0.406: R25.2@88.277,64.77 89.879,64.77 C15.1@90.221,65.112 93.013,65.112 D10.A@93.345,65.444 v1(93.345,64.44) 95.656,64.44 D11.C@96.139,63.957
  Bottom w0.305: R52.1@96.164,63.156 98.614,63.156 v1(98.857,63.398)
  Bottom w0.406: v1(93.345,64.44) 93.345,66.155 R51.2@93.408,66.219
NetC16_1: C16.1 D11.A D12.C R27.2 R52.2 R84.1 U1.24 | length 46.9
  Top w0.305: 94.691,60.707 95.072,60.326 v1(95.072,59.792) ; D11.A@96.139,60.707 96.596,61.163 100.355,61.163 104.089,64.897 104.089,87.554 104.939,88.404 U1.24@105.349,88.404
  Top w0.406: R27.2@88.277,60.922 89.993,60.922 C16.1@90.195,61.124 90.741,60.578 D12.C@93.548,60.578 93.676,60.707 94.691,60.707 D11.A@96.139,60.707
  Bottom w0.305: R84.1@93.523,59.854 95.01,59.854 v1(95.072,59.792) 96.164,60.884 R52.2@96.164,61.456
NetC17_1: C17.1 D12.A D19.C R84.2 R87.2 U1.26 | length 58.9
  Top w0.305: D19.C@96.228,56.057 96.278,56.007 97.688,56.007 105.283,63.602 105.283,86.792 105.613,87.122 112.547,87.122 113.487,88.062 113.487,88.57 113.153,88.904 U1.26@112.149,88.904
  Top w0.406: C17.1@90.221,57.2 93.42,57.2 D12.A@93.548,57.328 94.957,57.328 95.37,56.915 ; v1(94.183,56.134) 94.59,56.134 95.37,56.915 ; D19.C@96.228,56.057 95.37,56.915
  Bottom w0.406: R84.2@93.523,58.154 93.523,56.794 v1(94.183,56.134) 95.01,55.307 R87.2@96.19,55.307
NetC18_1: C18.1 R53.1 U1.28 | length 17.2
  Top w0.305: C18.1@111.187,81.686 113.69,81.686 116.357,84.353 116.357,86.665 116.459,86.766 117.489,86.766 R53.1@117.526,86.803 117.5,86.829 117.5,88.087 117.094,88.494 116.129,88.494 114.719,89.904 U1.28@112.149,89.904
NetC19_1: C19.1 R54.1 U1.27 | length 15.5
  Top w0.305: v1(111.15,84.303) 111.15,85.014 112.94,86.803 R54.1@115.24,86.803 115.24,88.468 114.304,89.404 U1.27@112.149,89.404 ; v1(111.176,79.807) 111.227,79.869 C19.1@111.213,79.654
  Bottom w0.305: v1(111.15,84.303) 111.15,79.832 v1(111.176,79.807)
NetC23_1: C23.1 U1.35 | length 24
  Top w0.305: U1.35@112.149,93.404 116.096,93.404 116.096,93.378 116.992,92.481 118.745,92.481 119.532,93.269 v1(119.532,93.523) ; v1(120.015,98.958) 120.548,98.958
  Top w0.61: v1(120.015,98.958) 126.492,98.958 127.381,99.847 C23.1@127.381,101.495
  Bottom w0.61: v1(119.532,93.523) 119.685,93.523 120.015,93.853 v1(120.015,98.958)
NetC43_1: C43.1 U$3.P$5 | length 2.4
  Top w0.406: C43.1@142.497,96.19 U$3.P$5@144.882,96.19
NetD18_A: D18.A F1.P$2 | length 6.1
  Top w1.27: D18.A@141.021,47.744 144.979,47.744 F1.P$2@146.512,46.211
NetD22_A: D22.A U$15.P$3 | length 5
  Top w1.27: D22.A@107.716,43.764 107.747,43.764 110.082,41.429 U$15.P$3@111.785,41.429
NetF1_P$1: F1.P$1 J1.3 J1.4 J1.5 J2.3 J2.4 J2.5 | length 53
  Top w1.27: F1.P$1@146.812,42.261 F1.P$1@146.512,41.961 148.26,41.961 150.484,44.185 J2.5@151.544,44.185 J2.4@151.544,46.385 J2.3@151.544,48.585
  Bottom w1.27: J2.5@151.544,44.185 J2.4@151.544,46.385 J2.3@151.544,48.585 149.281,48.585 147.447,50.419 147.447,74.803 147.63,74.986 J1.5@151.544,74.986 J1.4@151.544,77.186 J1.3@151.544,79.386
NetFAULT_A: FAULT.A U1.29 | length 10
  Top w0.305: U1.29@112.149,90.404 115.006,90.404 116.205,89.205 117.373,89.205 119.126,87.452 119.126,86.817 119.329,86.614 120.24,86.614 FAULT.A@120.244,86.618
NetFAULT_C: FAULT.C R85.2 | length 2.3
  Top w0.305: FAULT.C@120.244,88.718 122.152,88.718 R85.2@122.237,88.632 R85.2@121.967,88.649
NetIC8_1: IC8.1 R70.1 X3.9 | length 32.7
  Top w0.406: X3.9@45.593,55.335 49.059,55.335 51.562,52.832 51.562,49.022 R70.1@52.959,47.625 52.959,48.768 53.213,49.022 56.642,49.022 58.293,47.371 69.088,47.371 69.456,47.739 IC8.1@69.456,49.022
NetIC8_2: IC8.2 R68.1 X3.13 | length 38.8
  Top w0.406: X3.13@45.593,50.935 47.871,50.935 49.149,49.657 49.149,44.616 R68.1@52.998,40.767 52.998,41.822 53.467,42.291 57.277,42.291 58.42,43.434 69.342,43.434 70.726,44.818 IC8.2@70.726,49.022
NetIC8_3: IC8.3 U147.5 | length 28.6
  Top w0.406: IC8.3@71.996,49.022 71.996,45.733 v1(72.009,45.72) ; U147.5@80.492,39.619 80.512,39.599 81.712,39.599 81.864,39.446 v1(81.864,39.319)
  Bottom w0.406: v1(72.009,45.72) 72.009,41.961 70.206,40.157 70.206,36.017 70.536,35.687 73.99,35.687 77.495,39.192 81.737,39.192 v1(81.864,39.319)
NetIC8_4: IC8.4 R67.1 X3.15 | length 44.6
  Top w0.406: X3.15@45.593,48.735 47.277,48.735 48.133,47.879 48.133,40.132 50.927,37.338 R67.1@52.998,37.338 52.998,38.393 53.34,38.735 56.515,38.735 60.325,42.545 70.612,42.545 73.266,45.199 IC8.4@73.266,49.022
NetIC8_5: IC8.5 R69.1 X3.11 | length 45.1
  Top w0.305: IC8.5@74.536,49.022 IC8.5@74.549,49.009
  Top w0.406: X3.11@45.593,53.135 48.719,53.135 50.292,51.562 50.292,46.863 R69.1@52.959,44.196 52.959,45.085 53.848,45.974 v2(68.326,45.974) ; v1(73.66,43.561) 74.549,44.45 IC8.5@74.549,49.009
  Bottom w0.406: v2(68.326,45.974) 69.215,45.974 70.231,46.99 73.025,46.99 73.66,46.355 v1(73.66,43.561)
NetIC8_9: IC8.9 R64.1 U1.32 | length 73.1
  Top w0.305: R64.1@78.956,57.507 78.956,57.264 v1(79.705,56.515) ; v1(93.472,53.696) 94.463,53.696 94.793,54.026 103.048,54.026 108.814,59.792 v1(108.814,75.641) ; U1.32@112.149,91.904 113.379,91.904 v1(113.843,91.44)
  Top w0.406: IC8.9@78.346,55.169 78.346,56.897 R64.1@78.956,57.507
  Bottom w0.305: v1(79.705,56.515) 81.051,56.515 81.991,57.455 83.642,57.455 86.97,54.127 93.04,54.127 v1(93.472,53.696) ; v1(108.814,75.641) 108.814,77.927 110.033,79.146 110.033,85.014 113.843,88.824 v1(113.843,91.44)
NetIC8_10: IC8.10 R65.1 U1.33 | length 84
  Top w0.305: IC8.10@77.076,55.169 77.064,55.156 77.064,53.34 77.622,52.781 78.283,52.781 79.807,54.305 v1(79.832,54.305) ; v1(84.607,53.061) 84.861,53.315 91.719,53.315 93.37,51.664 102.845,51.664 110.338,59.157 v1(110.338,77.445) ; U1.33@112.149,92.404 112.151,92.405 114.91,92.405 115.24,92.075 v1(115.24,91.364)
  Top w0.406: R65.1@76.848,57.507 77.076,57.278 IC8.10@77.076,55.169
  Bottom w0.305: v1(79.832,54.305) 81.864,56.337 83.363,56.337 84.607,55.093 v1(84.607,53.061) ; v1(110.338,77.445) 111.506,78.613 111.709,78.613 112.141,79.045 112.141,86.284 114.833,88.976 114.833,90.373 115.24,90.78 v1(115.24,91.364)
NetIC8_11: IC8.11 R71.1 X3.7 | length 38.8
  Top w0.406: X3.7@45.593,57.535 50.415,57.535 50.8,57.15 R71.1@52.998,57.15 52.998,57.824 53.594,58.42 66.04,58.42 v2(67.691,60.071) ; v1(75.667,61.417) 75.806,61.277 IC8.11@75.806,55.169 IC8.11@75.87,55.105
  Bottom w0.406: v2(67.691,60.071) 69.037,61.417 v1(75.667,61.417)